# Altium PCB PCB_TSAL_mainhoop2.PcbDoc
Units mm, origin at the board's own origin, x right, y up, seen from the top; angles counter-clockwise.
Board outline 55 x 55 mm, 2 copper layers (Top Layer, Bottom Layer); 21 components, 3 nets, 83 pads, 0 vias.
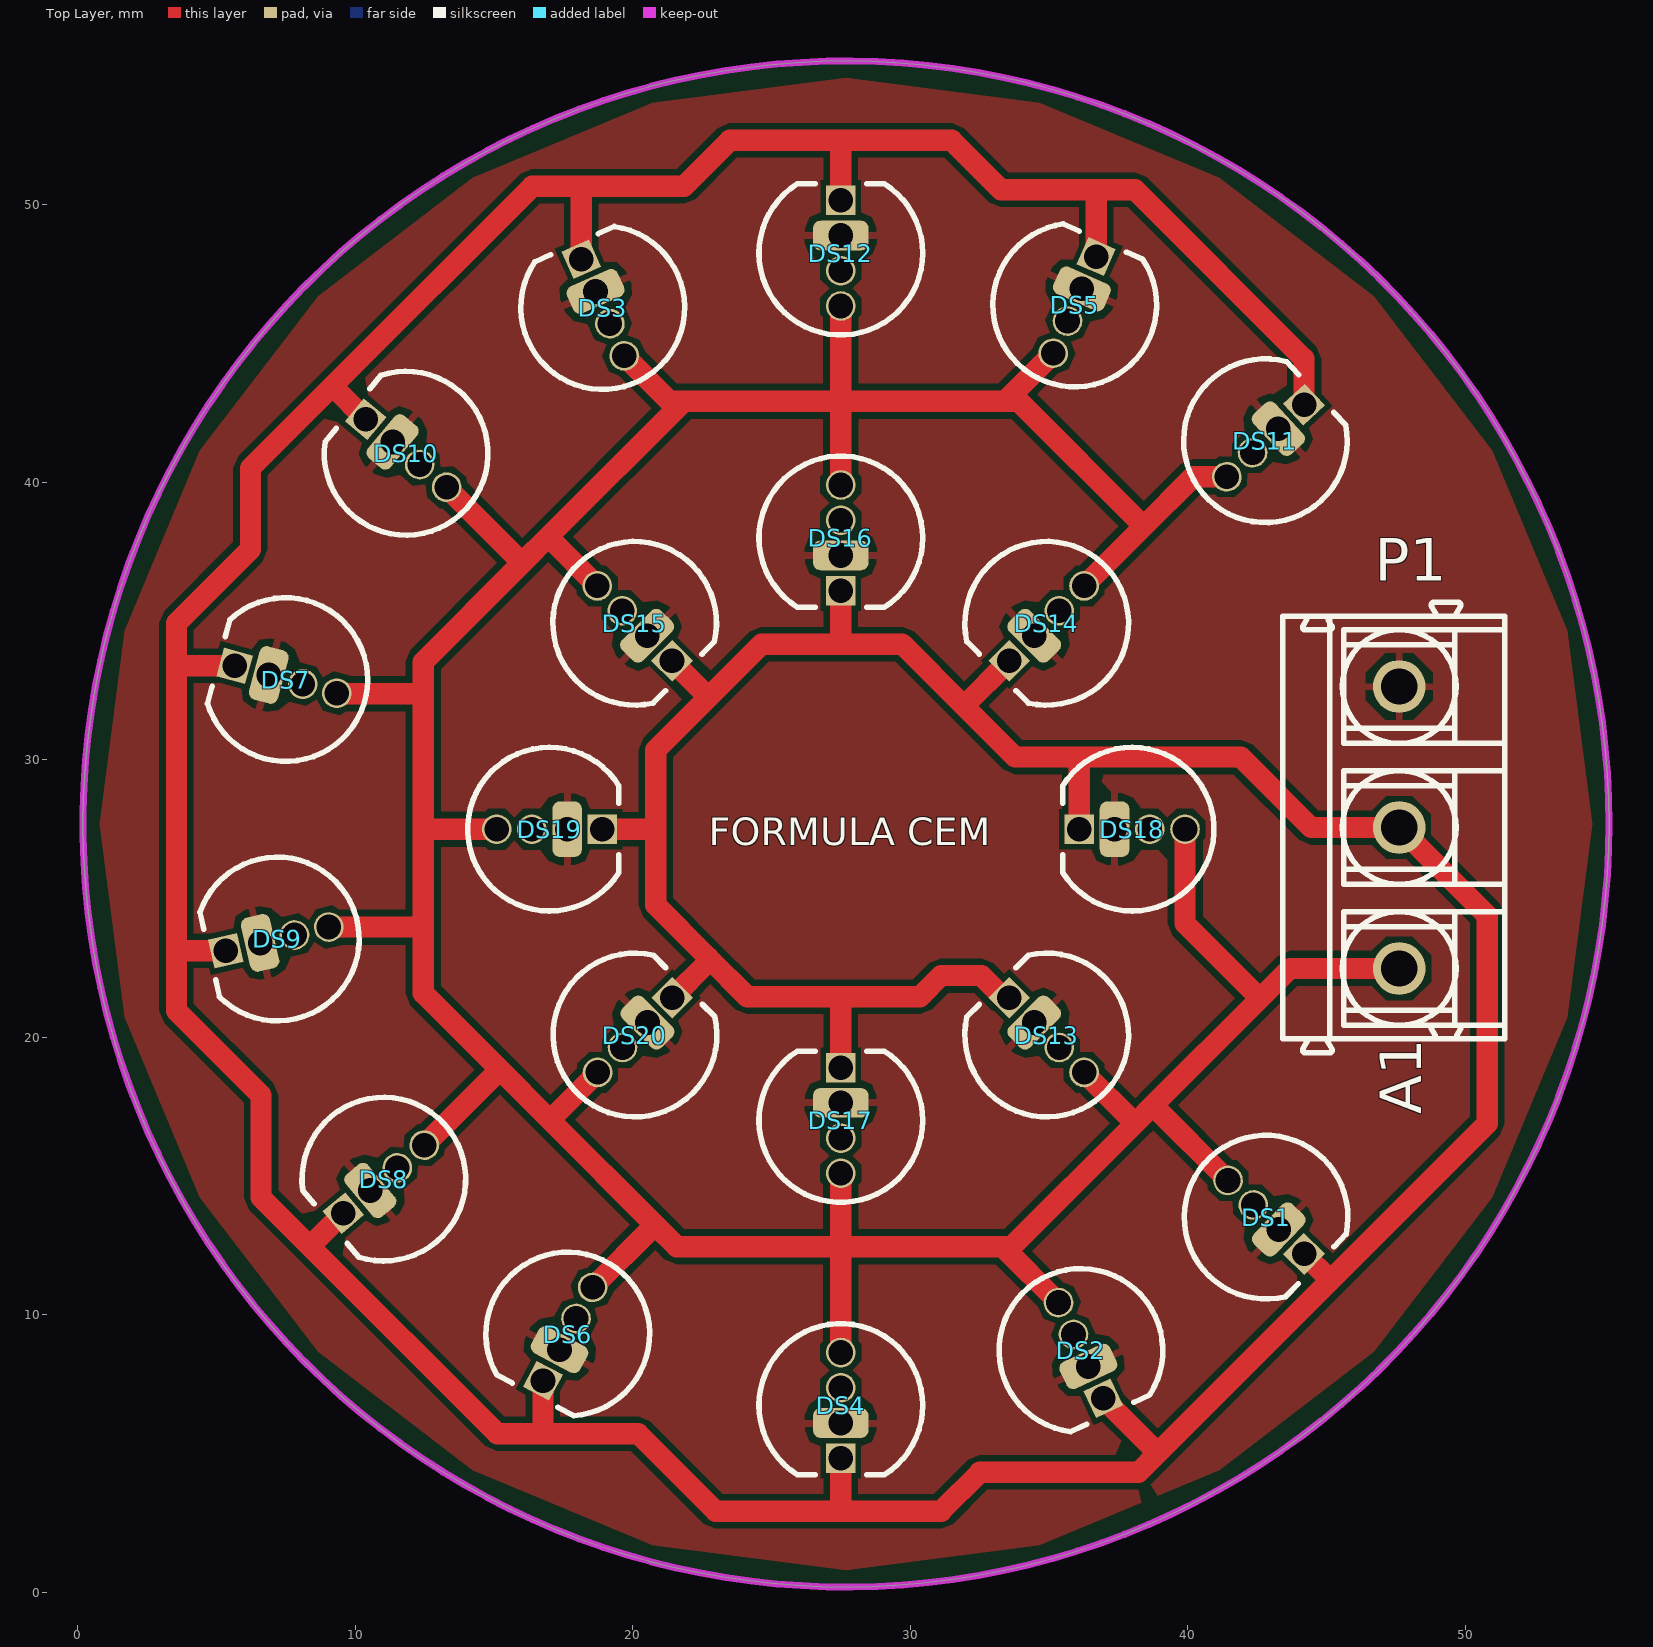
[diagram p0: Top Layer view]
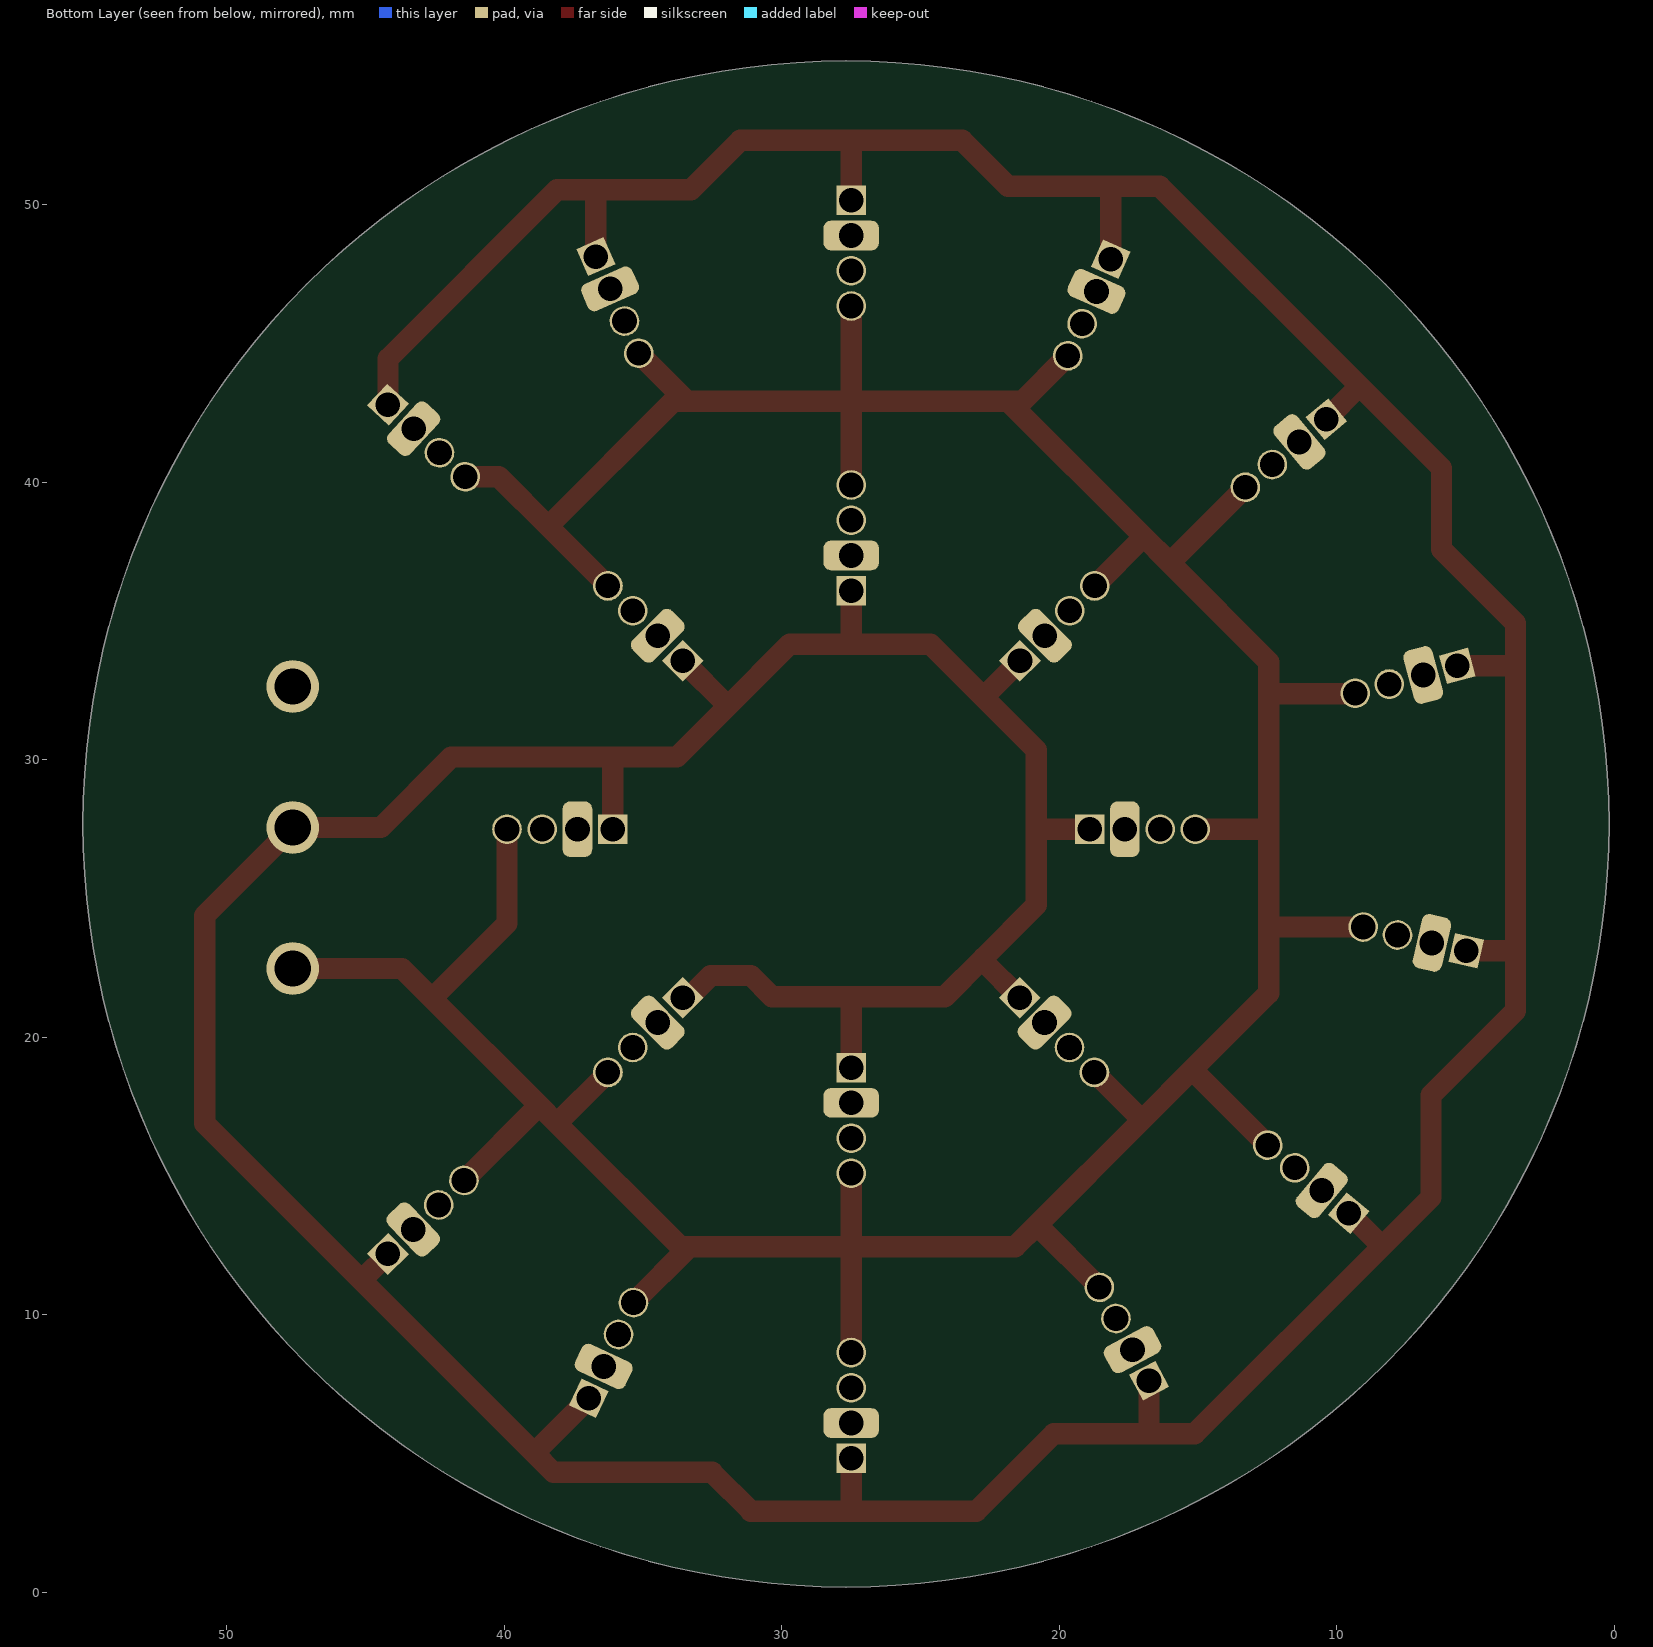
[diagram p1: Bottom Layer view, seen from below]

## Layer stack, top to bottom
Top Solder: solder mask 0.0102, Solder Resist, Dk 3.5
Top Layer: signal copper 0.0356
Dielectric 1: dielectric 0.32, FR-4, Dk 4.8
Bottom Layer: signal copper 0.0356
Bottom Solder: solder mask 0.0102, Solder Resist, Dk 3.5

## Board outline
27.686,0.186 cw(c27.686,27.686) 0.186,27.686 cw(c27.686,27.686) 27.686,55.186 cw(c27.686,27.686) 55.186,27.686 cw(c27.686,27.686)

## Design rules (kind name [scope] priority, off if disabled: settings)
Clearance [All] p1: gap=0.199 ignorepadtopadclearanceinfootprint=FALSE except(0: Arc-Hole Track-Hole SMDPad-Hole THPad-Hole Via-Hole Fill-Hole Poly-Hole Region-Hole Text-Hole)
PolygonConnect [All] p1: connectstyle=Relief reliefconductorwidth=0.254 reliefentries=4 polygonreliefangle="90 Angle" airgapwidth=0.254
RoutingVias [All] p1: holewidth=0.711 width=1.27 viastyle="Through Hole" minholewidth=0.711 minwidth=1.27 maxholewidth=0.711 maxwidth=1.27
SolderMaskExpansion [All] p1: expansion=0.102 istentingtop=FALSE
Width Red [InNet('In_RED')] p1: maxlimit=0.768 minlimit=0.768 preferedwidth=0.768 minimp=50.000000 maximp=50.000000 favimp=50.000000
Width Green [InNet('In_GREEN')] p2: maxlimit=0.768 minlimit=0.768 preferedwidth=0.768 minimp=50.000000 maximp=50.000000 favimp=50.000000
Width [All] p3: maxlimit=0.254 minlimit=0.254 preferedwidth=0.254
30 further rules are at their usual default settings.

## Components (designator, comment, footprint, x,y, rotation, side; value= is the part's Value field where it differs from the comment)
DS1 "WP154A4SUREQBFZGC" KING-WP154A4SUREQBFZGC_V 42.826,13.515 r226 top
DS2 "WP154A4SUREQBFZGC" KING-WP154A4SUREQBFZGC_V 36.152,8.712 r205 top
DS3 "WP154A4SUREQBFZGC" KING-WP154A4SUREQBFZGC_V 18.919,46.3 r24 top
DS4 "WP154A4SUREQBFZGC" KING-WP154A4SUREQBFZGC_V 27.5,6.731 r180 top
DS5 "WP154A4SUREQBFZGC" KING-WP154A4SUREQBFZGC_V 35.928,46.393 r336 top
DS6 "WP154A4SUREQBFZGC" KING-WP154A4SUREQBFZGC_V 17.658,9.302 r152 top
DS7 "WP154A4SUREQBFZGC" KING-WP154A4SUREQBFZGC_V 7.493,32.893 r75 top locked
DS8 "WP154A4SUREQBFZGC" KING-WP154A4SUREQBFZGC_V 11.027,14.886 r130 top
DS9 "WP154A4SUREQBFZGC" KING-WP154A4SUREQBFZGC_V 7.19,23.543 r103 top
DS10 "WP154A4SUREQBFZGC" KING-WP154A4SUREQBFZGC_V 11.833,41.048 r50 top
DS11 "WP154A4SUREQBFZGC" KING-WP154A4SUREQBFZGC_V 42.803,41.5 r313 top
DS12 "WP154A4SUREQBFZGC" KING-WP154A4SUREQBFZGC_V 27.5,48.26 r0 top
DS13 "WP154A4SUREQBFZGC" KING-WP154A4SUREQBFZGC_V 34.92,20.08 r45 top
DS14 "WP154A4SUREQBFZGC" KING-WP154A4SUREQBFZGC_V 34.92,34.92 r135 top
DS15 "WP154A4SUREQBFZGC" KING-WP154A4SUREQBFZGC_V 20.07,34.92 r225 top
DS16 "WP154A4SUREQBFZGC" KING-WP154A4SUREQBFZGC_V 27.5,38 r180 top
DS17 "WP154A4SUREQBFZGC" KING-WP154A4SUREQBFZGC_V 27.5,17 r0 top
DS18 "WP154A4SUREQBFZGC" KING-WP154A4SUREQBFZGC_V 38,27.5 r90 top
DS19 "WP154A4SUREQBFZGC" KING-WP154A4SUREQBFZGC_V 17,27.5 r270 top
DS20 "WP154A4SUREQBFZGC" KING-WP154A4SUREQBFZGC_V 20.08,20.08 r315 top
P1 "1760500000" PM_5_08_90_03 47.425,27.559 r90 top

## Footprints (in the part's own frame and the unit in brackets; to place one, negate y for a bottom-side part, rotate by r counter-clockwise, add the part's x,y. Pads: shape width x height; smd on the part's side, far side on the other; paste and mask are expansions set on the pad)
KING-WP154A4SUREQBFZGC_V [mm] "THD, 4-Leads, Dia 5.9mm, Pitch 1.27mm"
  rect 1.07x1.07 hole 0.889 paste+0: 1(0,1.905)
  rrect50% 2x1.07 hole 0.889 paste+0: 2(0,0.635)
  round 1.07 hole 0.889 paste+0: 3(0,-0.635) 4(0,-1.905)
  silkscreen extent -2.95,-2.95 2.95,2.5
PM_5_08_90_03 [mm] "PM 5.08/03/90 3.5"
  round 1.9 hole 1.3: A1(-5.08,-0.2) A2(0,-0.2) A3(5.08,-0.2)
  silkscreen extent -8.12,-4 8.12,4, body extent -8.12,-4 8.12,4, height 10.01

## Part data
DS1 DS2 DS3 DS4 DS5 DS6 DS7 DS8 DS9 DS10 DS11 DS12 DS13 DS14 DS15 DS16 DS17 DS18 DS19 DS20: library part CMP-2000-07415-1, "Full Color LED Lamp, Dominant Wavelength RGB 630 / 525 / 465 nm, -40 to 85 degC, 4-Pin THD, RoHS", Color=Red,Green,Blue(RGB), Current - Test=20mA, Manufacturer=Kingbright, Millicandela Rating=1300mcdRed,1700mcdGreen,900mcdBlue, Package / Case=Radial-4Leads, Package Description="4-Pin Through Hole LED, Dia 5.9 mm, Pitch 1.27 mm", Standard Package=500, Voltage - Forward (Vf) (Typ)=1.9VRed,3.3VGreen,3.3VBlue, 3D Model="WP154A4SUREQBFZGW.sldprt /  / WP154A4SUREQBFZGW.pro /  / WP154A4SUREQBFZGW.igs /  / WP154A4SUREQBFZGW.stp", Category=Optoelectronics, Datasheet URL=https://www.kingbrightusa.com/images/catalog/spec/WP154A4SUREQBFZGC.pdf, Datasheet Version="Rev. 5A, 08/2014", Family=LEDIndication-Discrete, Height=8.60mm, Lens Style/Size=RoundwithDomedTop,5mm,T-13/4, Lens Type=Clear, Manufacturer URL=http://www.kingbright.com/, Mounting Technology=ThroughHole, Mounting Type=ThroughHole, Online Catalog=5mm,T-13/4(RGB)RoundwithDomedTopLEDLamp, Other Names="754-1615 / WP154A4SUREQBFZGC-ND", Package Reference=WP154A4SUREQBFZGC, Packaging=Bulk, Viewing Angle=50°, Wavelength - Dominant=630nm,525nm,465nm, Wavelength - Peak=645nm,515nm,460nm
P1: library part CMP-1559-01629-1, "OMNIMATE Signal - series PM", Colour=Orange, Manufacturer=Weidmueller, Rated_current_use_group_B_UL_1059="15 A", Rated_voltage_for_surge_voltage_class_pollution_degree_II_2="600 V", Rated_voltage_use_group_B_UL_1059="300 V", UL_94_flammability_rating=V-0, ComponentLink1Description="Manufacturer URL", ComponentLink1URL=http://www.weidmueller.com/, ComponentLink2Description="URL Link1", ComponentLink2URL=http://catalog.weidmueller.com/catalog/Start.do?localeId=en&ObjectID=1760500000, Contact_material=Cu-Leg, Contact_surface=tinned, Insulating_material="Wemid (PA)", Mounting_onto_the_PCB="Solder connection", No_of_poles=3, PackageReference=PM_5_08_90_03, Packaging=Box, PartNumber=1760500000, Pitch_inch="0,2 inch", Pitch_mm="5,08 mm", Qty="500 PCS", Revision=V1, Short_text_for_material="PM 5.08/03/90 3.5SN OR BX", Side_termination_characteristic="closed side", Solder_pin_length_mm="3,5 mm", Solid_max_H05_07_V_U="2,5 mm²", Solid_min_H05_07_V_U="0,13 mm²", Wire_cross_section_AWG_max_UL_1059="AWG 14", Wire_cross_section_AWG_min_UL_1059="AWG 26"

## Nets (pads, with @x,y where several pads share a name; then routed paths per layer and width w, separated by ;. In a path a pad name is that pad's centre, name@x,y a point inside that pad or via, vN(x,y) a via of type N, cw(c..) or ccw(c..) an arc to the next point about the centre after c; other vN are vias at no path point)
GND: DS1.2 DS2.2 DS3.2 DS4.2 DS5.2 DS6.2 DS7.2 DS8.2 DS9.2 DS10.2 DS11.2 DS12.2 DS13.2 DS14.2 DS15.2 DS16.2 DS17.2 DS18.2 DS19.2 DS20.2 P1.A3
In_GREEN: DS1.4 DS2.4 DS3.4 DS4.4 DS5.4 DS6.4 DS7.4 DS8.4 DS9.4 DS10.4 DS11.4 DS12.4 DS13.4 DS14.4 DS15.4 DS16.4 DS17.4 DS18.4 DS19.4 DS20.4 P1.A1 | length 153.7
  Top Layer w0.768: DS9.4 12.414,23.971 12.446,24.003 ; DS7.4 9.348,32.385 12.446,32.385 ; DS8.4 15.113,18.737 15.113,18.923 ; DS10.4 16.002,37.114 16.002,37.084 ; DS19.4 12.505,27.5 12.446,27.559 ; DS6.4 20.777,13.208 20.828,13.208 ; DS15.4 17.018,37.972 17.018,38.1 ; DS20.4 17.018,17.018 ; DS3.4 21.327,42.926 21.844,42.926 ; DS4.4 27.5,12.378 27.432,12.446 ; DS17.4 27.5,12.514 27.432,12.446 ; DS16.4 27.5,42.791 27.635,42.926 ; DS12.4 27.5,43.061 27.635,42.926 ; DS5.4@35.153,44.571 DS5.4 33.427,42.926 ; DS2.4 33.339,12.446 ; DS13.4 38.1,16.9 38.1,16.891 ; DS14.4 38.354,38.354 ; DS18.4 39.905,24.103 42.608,21.399 ; DS11.4 40.201,40.201 38.354,38.354 ; DS1.4 38.798,17.495 38.798,17.59 ; P1.A1 43.688,22.479 42.608,21.399 ; 12.446,24.003 12.446,27.559 ; 12.446,24.003 12.446,21.59 15.113,18.923 ; 12.446,27.559 12.446,32.385 ; 12.446,32.385 12.446,33.528 16.002,37.084 ; 15.113,18.923 17.018,17.018 ; 16.002,37.084 17.018,38.1 ; 17.018,17.018 20.828,13.208 ; 17.018,38.1 21.844,42.926 ; 20.828,13.208 21.59,12.446 27.432,12.446 ; 21.844,42.926 27.635,42.926 ; 27.432,12.446 33.339,12.446 ; 27.635,42.926 33.427,42.926 ; 33.339,12.446 33.655,12.446 38.1,16.891 ; 33.427,42.926 33.909,42.926 38.354,38.481 38.354,38.354 ; 38.1,16.891 38.798,17.59 ; 38.798,17.59 42.608,21.399
In_RED: DS1.1 DS2.1 DS3.1 DS4.1 DS5.1 DS6.1 DS7.1 DS8.1 DS9.1 DS10.1 DS11.1 DS12.1 DS13.1 DS14.1 DS15.1 DS16.1 DS17.1 DS18.1 DS19.1 DS20.1 P1.A2 | length 232.3
  Top Layer w0.768: DS9.1 3.556,23.114 ; DS7.1 3.571,33.386 3.556,33.401 ; DS8.1 8.416,12.509 8.319,12.509 ; DS10.1 9.212,43.434 9.144,43.434 ; DS6.1 16.764,5.715 ; DS3.1 18.144,50.656 18.161,50.673 ; DS19.1 20.769,27.5 20.828,27.559 ; DS15.1 22.733,32.258 ; DS20.1 22.733,22.733 22.733,22.86 ; DS4.1 27.5,2.98 27.559,2.921 ; DS17.1 27.5,21.395 27.432,21.463 ; DS16.1 27.5,34.231 27.432,34.163 ; DS12.1 27.5,52.319 27.495,52.324 ; DS13.1 33.359,21.427 32.561,22.225 31.115,22.225 30.353,21.463 27.432,21.463 ; DS14.1 31.941,31.941 ; DS18.1 36.095,30.072 36.068,30.099 ; DS5.1 36.703,50.546 ; DS2.1 38.925,5.016 ; DS1.1 45.085,11.303 45.212,11.303 ; DS11.1 44.196,44.45 38.1,50.546 36.703,50.546 ; 3.556,23.114 3.556,33.401 ; 3.556,23.114 3.556,20.955 6.604,17.907 6.604,14.224 8.319,12.509 ; 3.556,33.401 3.556,34.925 6.223,37.592 6.223,40.513 9.144,43.434 ; 8.319,12.509 15.113,5.715 16.764,5.715 ; 9.144,43.434 16.383,50.673 18.161,50.673 ; 16.764,5.715 20.193,5.715 22.987,2.921 27.559,2.921 ; 18.161,50.673 21.844,50.673 23.495,52.324 27.495,52.324 ; 20.828,27.559 20.828,30.353 22.733,32.258 ; 20.828,27.559 20.828,24.765 22.733,22.86 ; 22.733,22.86 24.13,21.463 27.432,21.463 ; 22.733,32.258 24.638,34.163 27.432,34.163 ; 27.432,34.163 29.718,34.163 31.941,31.941 ; 27.495,52.324 31.496,52.324 33.274,50.546 36.703,50.546 ; 27.559,2.921 31.115,2.921 32.512,4.318 38.227,4.318 38.925,5.016 ; 31.941,31.941 33.782,30.099 36.068,30.099 ; 36.068,30.099 41.91,30.099 44.45,27.559 P1.A2 50.8,24.384 50.8,16.891 45.212,11.303 ; 38.925,5.016 45.212,11.303
pads on no net: DS1.3 DS2.3 DS3.3 DS4.3 DS5.3 DS6.3 DS7.3 DS8.3 DS9.3 DS10.3 DS11.3 DS12.3 DS13.3 DS14.3 DS15.3 DS16.3 DS17.3 DS18.3 DS19.3 DS20.3

## Polygon pours and split planes (outlines as drawn)
GND on Top Layer "GND_L01_P000" (solid, pour order 0): 27.686,0.186 cw(c27.686,27.686) 0.186,27.686 cw(c27.686,27.686) 27.686,55.186 cw(c27.686,27.686) 55.186,27.686 cw(c27.686,27.686)

## Keep-outs
Top Layer:
  circle w0.254: c27.686,27.686 r27.5

## Silkscreen, mask and mechanical layers (free items; w line width, h text height)
Top Overlay:
  text "FORMULA CEM" at 22.733,26.924 h1

## Text inside footprints (layer, text, board x,y; h text height)
P1: Top Overlay "A1" at 48.42,17.217 h1.5 r90